# Altium PCB Gateway.PcbDoc (part 1 of 2)
Units mil, origin at the board's own origin, x right, y up, seen from the top; angles counter-clockwise.
Board outline 3149.61 x 3909.45 mil, 2 copper layers (Top Layer, Bottom Layer); 140 components, 140 nets, 576 pads, 80 vias.
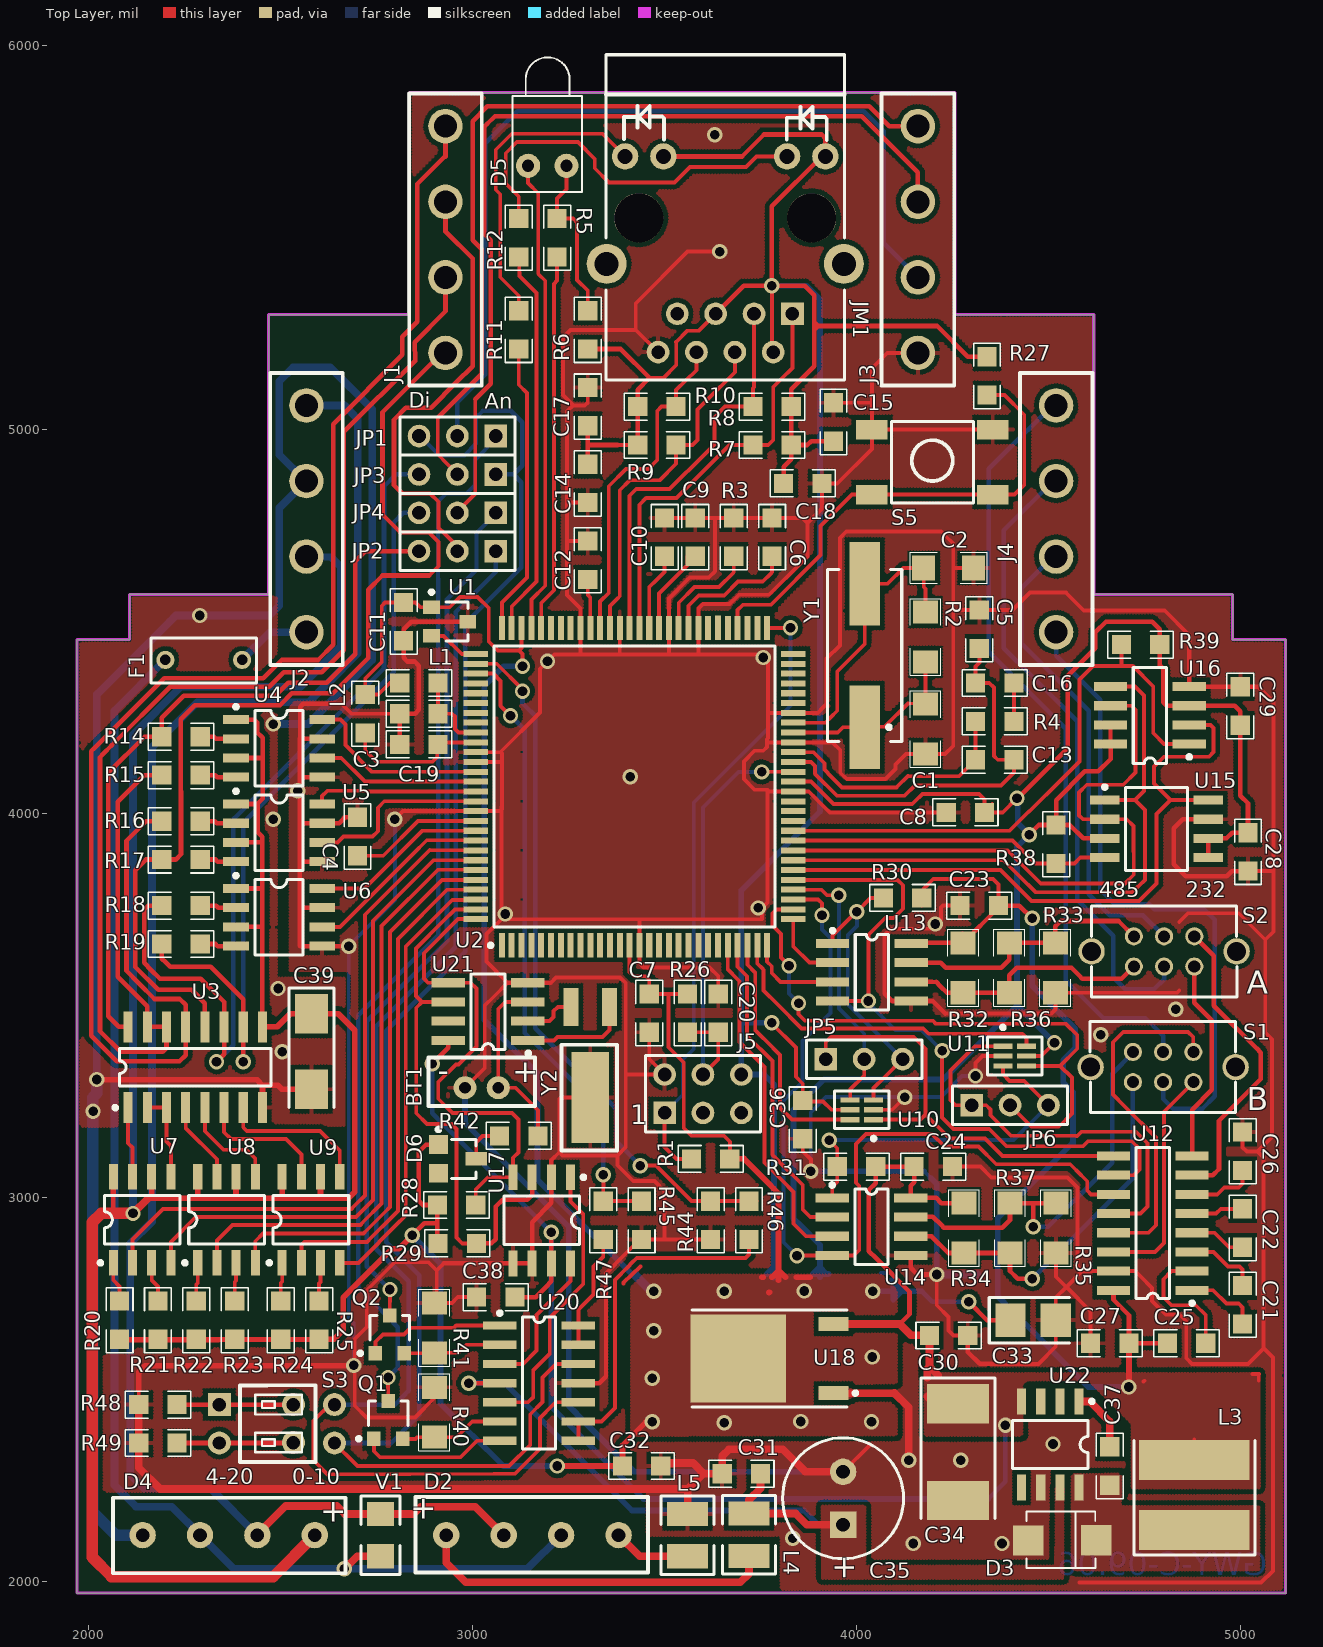
[diagram p0: Top Layer view]
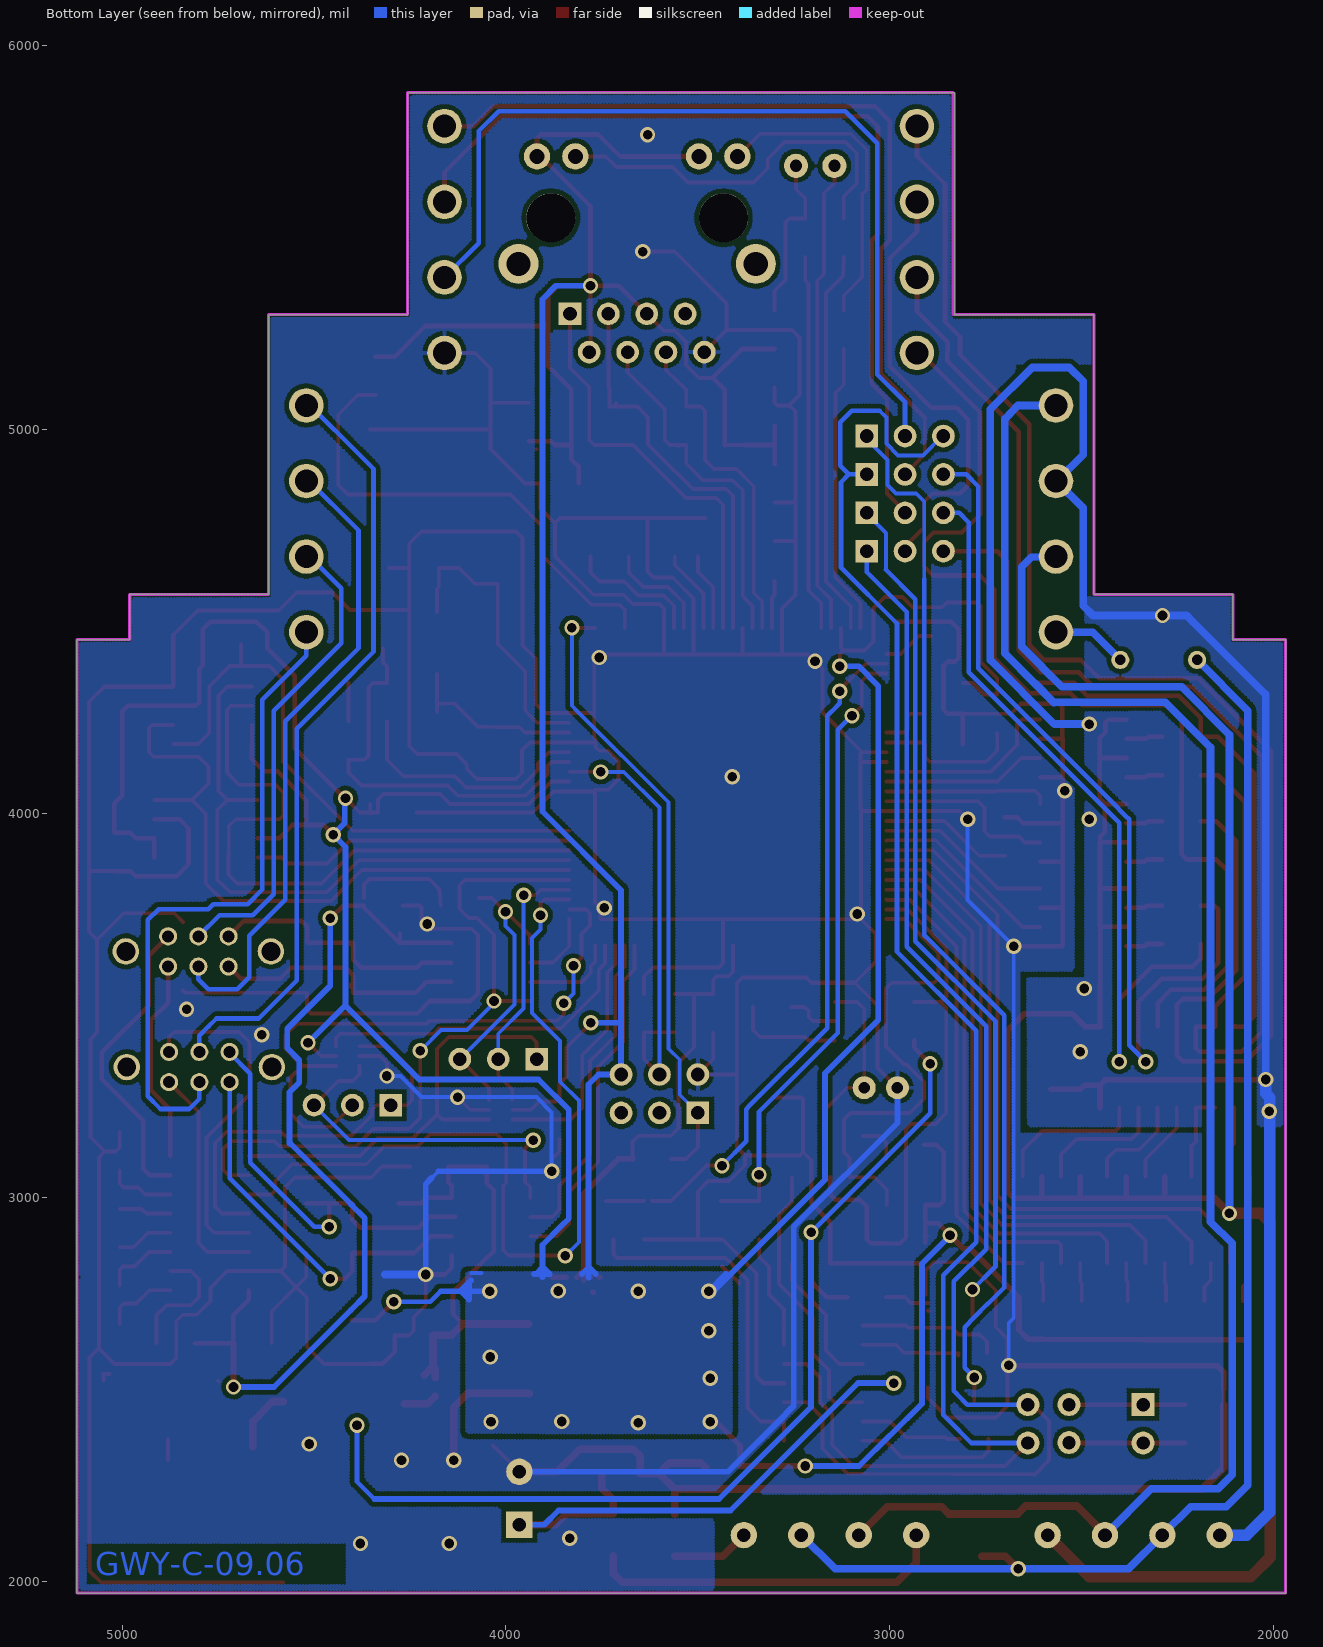
[diagram p1: Bottom Layer view, seen from below]

## Layer stack, top to bottom
Top Layer: signal copper 1.4
Dielectric: dielectric 12.6, FR-4, Dk 4.8
Bottom Layer: signal copper 1.4

## Board outline
1968.5,1968.5 1968.5,4452.76 2106.3,4452.76 2106.3,4570.87 2468.5,4570.87 2468.5,5299.21 2830.71,5299.21 2830.71,5877.95 4255.91,5877.95 4255.91,5299.21 4618.11,5299.21 4618.11,4570.87 4980.31,4570.87 4980.31,4452.76 5118.11,4452.76 5118.11,1968.5

## Design rules (kind name [scope] priority, off if disabled: settings)
Clearance PolyBorder [InPoly vs (OnLayer('Keep-Out Layer'))] p1: gap=1
Clearance And_SOT23 [(InComponent('U10') AND InPadClass('All Pads')) vs (InComponent('U10') AND InPadClass('All Pads'))] p2: gap=6
Clearance Micro [(InComponent('U2') AND InPadClass('All Pads')) vs (InComponent('U2') AND InPadClass('All Pads'))] p3: gap=6
Clearance Polygon [InPoly] p4: gap=12
Clearance [All] p5: gap=10
ComponentClearance [All] p1: gap=10 collisioncheckmode=0
HoleSize [All] p1: absolutevalues=TRUE maxlimit=150 minlimit=1 maxpercent=80.000 minpercent=20.000
PolygonConnect FullConected [(InComponent('U18') OR InComponent('L3') OR InComponent('D3') OR InComponent('C34') OR InComponent('C37') OR InComponent('C35') OR InComponent('U22'))] p1: connectstyle=Direct reliefconductorwidth=10 reliefentries=4 polygonreliefangle="90 Angle"
PolygonConnect [All] p2: connectstyle=Relief reliefconductorwidth=10 reliefentries=4 polygonreliefangle="90 Angle"
RoomDefinition IIC [InComponentClass('IIC')] p1: confinementstyle=ConfineOut formatcopy=TRUE outline 4148.61,1367.13 5119.09,1367.13 5119.09,1697.83 4148.61,1697.83
RoomDefinition UART [InComponentClass('UART')] p2: confinementstyle=ConfineOut formatcopy=TRUE outline 1971.46,975.39 2840.55,975.39 2840.55,1269.68 1971.46,1269.68
RoomDefinition SPI [InComponentClass('SPI')] p3: confinementstyle=ConfineOut formatcopy=TRUE outline 3040.35,1380.91 3972.44,1380.91 3972.44,1690.94 3040.35,1690.94
RoomDefinition POWER [InComponentClass('POWER')] p4: confinementstyle=ConfineOut formatcopy=TRUE outline 3034.45,976.38 3966.54,976.38 3966.54,1274.61 3034.45,1274.61
RoomDefinition MAIN [InComponentClass('MAIN')] p5: confinementstyle=ConfineOut formatcopy=TRUE outline 1970.47,1376.97 2865.16,1376.97 2865.16,1680.12 1970.47,1680.12
RoomDefinition GPIO [InComponentClass('GPIO')] p6: confinementstyle=ConfineOut formatcopy=TRUE outline 4154.53,960.63 5121.06,960.63 5121.06,1263.78 4154.53,1263.78
RoutingVias [All] p1: holewidth=23.62 width=39.37 viastyle="Through Hole" minholewidth=28 minwidth=50 maxholewidth=28 maxwidth=50
SMDNeckDown [All] p1: percent=95.000
SolderMaskExpansion [All] p1: expansion=4
TestPointUsage [All] p1: valid=0 allowmultiple=FALSE
Testpoint [All] p1: side=15 testpointundercomponent=TRUE minsize=40 maxsize=100 preferedsize=60 minholesize=0 maxholesize=40 preferedholesize=32 testpointgrid=1 style=1023 order=1234567890
Width [All] p1: maxlimit=30 minlimit=8 preferedwidth=10 toplayer_prefwidth=12 bottomlayer_prefwidth=15 minimp=50.000000 maximp=50.000000 favimp=50.000000
16 further rules are at their usual default settings.

## Classes and differential pairs
net class IO_AAG_[0..3]: IO_AAG_0 IO_AAG_1 IO_AAG_2 IO_AAG_3
net class AAG_I[1..2]: AAG_I1 AAG_I2
component class MAIN: C1 C2 C3 C4 C5 C6 C7 C8 C9 C10 C11 C12 C13 C14 C15 C16 C17 C18 C19 C20 D5 J5 JM1 L1 L2 R1 R2 R3 R4 R5 R6 R7 R8 R9 R10 R11 R12 R26 R27 S5 U1 U2 Y1
component class GPIO: J1 J3 JP1 JP2 JP3 JP4 R14 R15 R16 R17 R18 R19 R20 R21 R22 R23 R24 R25 U3 U4 U5 U6 U7 U8 U9
component class IIC: BT1 C38 D6 Q1 Q2 R28 R29 R40 R41 R42 R44 R45 R46 R47 R48 R49 S3 U17 U20 U21 Y2
component class POWER: C30 C31 C32 C33 C34 C35 C37 C39 D2 D3 D4 F1 J2 L3 L4 L5 U18 U22 V1
component class SPI: C28 C29 R38 R39 U15 U16
component class UART: C21 C22 C23 C24 C25 C26 C27 C36 J4 JP5 JP6 JU5 R30 R31 R32 R33 R34 R35 R36 R37 S1 S2 U10 U11 U12 U13 U14
net class SPI_[0..4]: SPI_0 SPI_1 SPI_2 SPI_3 SPI_4
net class UART_[0..1]: UART_0 UART_1 UART_2 UART_3
net class CTRL485_[0..3]: CTRL485_0 CTRL485_1 CTRL485_2 CTRL485_3 CTRL485_4 CTRL485_5
net class GPIO_I[1..6]: GPIO_I1 GPIO_I2 GPIO_I3 GPIO_I4 GPIO_I5 GPIO_I6
net class GPIO_O[1..6]: GPIO_O1 GPIO_O2 GPIO_O3 GPIO_O4 GPIO_O5 GPIO_O6
net class IIC_[0..1]: IIC_0 IIC_1

## Components (designator, comment, footprint, x,y, rotation, side; value= is the part's Value field where it differs from the comment)
BT1 "Battery" LITHIUM_BAT 2980,3285.56 r0 top
C1 "Cap Semi" _1206 4180,4220 r270 top
C2 "Cap Semi" _1206 4240,4640 r0 top
C3 "Cap Semi" _0805 2860,4260 r0 top
C4 "Cap Semi" _0805 2700,3940 r90 top
C5 "Cap Semi" _0805 4320,4480 r90 top
C6 "Cap Semi" _0805 3780,4720 r90 top
C7 "Cap Semi" _0805 3460,3480 r90 top
C8 "Cap Semi" _0805 4283.58,4002.95 r0 top
C9 "Cap Semi" _0805 3580,4720 r270 top
C10 "Cap Semi" _0805 3500,4720 r270 top
C11 "Cap Semi" _0805 2820,4500 r90 top
C12 "Cap Semi" _0805 3300,4660 r270 top
C13 "Cap Semi" _0805 4360,4140 r180 top
C14 "Cap Semi" _0805 3300,4860 r90 top
C15 "Cap Semi" _0805 3940,5020 r270 top
C16 "Cap Semi" _0805 4360,4340 r0 top
C17 "Cap Semi" _0805 3300,5060 r270 top
C18 "Cap Semi" _0805 3860,4860 r180 top
C19 "Cap Semi" _0805 2860,4180 r0 top
C20 "Cap Semi" _0805 3640,3480 r270 top
C21 "Cap Semi" _0805 5006,2720 r270 top
C22 "Cap Semi" _0805 5006,2920 r90 top
C23 "Cap Semi" _0805 4320,3760 r180 top
C24 "Cap Semi" _0805 4200,3080 r0 top
C25 "Cap Semi" _0805 4860,2620 r0 top
C26 "Cap Semi" _0805 5006,3120 r90 top
C27 "Cap Semi" _0805 4660,2620 r180 top
C28 "Cap Semi" _0805 5020,3900 r270 top
C29 "Cap Semi" _0805 5000,4280 r90 top
C30 "Cap Semi" _0805 4240,2640 r180 top
C31 "Cap Semi" _0805 3700,2280 r0 top
C32 "Cap Semi" _0805 3440,2300 r180 top
C33 "Cap Pol3" TC3528-1411 4460,2680 r0 top
C34 "Cap Pol3" TC7360-2924 4264.92,2336 r270 top
C35 "Cap Pol1" CAPPR3.5-8X11.5 3964.92,2216 r90 top
C36 "Cap Semi" _0805 3860,3202.41 r90 top
C37 "Cap Semi" _0805 4660,2300 r90 top
C38 "Cap Semi" _0805 3060,2740 r180 top
C39 "Cap Pol3" TC6032-2412 2580,3380 r270 top
D2 "Bridge1" BRIDGE_2A 3380,2120 r180 top locked
D3 "Diode" SMA 4620,2080 r0 top
D4 "Bridge1" BRIDGE_2A 2140,2120 r0 top locked
D5 "LED1" LED_PCB 3200,5740 r0 top locked
D6 "Diode BAS70" SO-G3/C2.5#1 2960,3100 r270 top
F1 "FUSIBLE" FUSE 2300,4400 r180 top
J1 "BORNERA_X4" BORNERA_X4 2929.13,5790.55 r270 top locked
J2 "BORNERA_X4" BORNERA_X4 2566.93,4472.44 r90 top locked
J3 "BORNERA_X4" BORNERA_X4 4160,5790.55 r270 top locked
J4 "BORNERA_X4" BORNERA_X4 4520,4472.44 r90 top locked
J5 "DEBUG" HDR2X3 3500,3220 r0 top
JM1 "JACK_RJ45_LED" JACK_RJ45_LEDS 3658.03,5959.02 r180 top locked
JP1 "Header 3" HDR1X3 3060.16,4983.39 r180 top
JP2 "Header 3" HDR1X3 3060.16,4683.39 r180 top
JP3 "Header 3" HDR1X3 3060.16,4883.39 r180 top
JP4 "Header 3" HDR1X3 3060.16,4783.39 r180 top
JP5 "Header 3" HDR1X3 3920,3360 r0 top
JP6 "Header 3" HDR1X3 4300,3240 r0 top
L1 "Inductor" _0805 2860,4340 r180 top
L2 "Inductor" _0805 2720,4260 r90 top
L3 "Inductor" POWER_IND 4880,2240 r270 top
L4 "Inductor" CR3225-1210 3720,2121 r90 top
L5 "Inductor" CR3225-1210 3560,2120 r90 top
Q1 "QNPN" SO-G3/C2.5#2 2780,2420 r0 top
Q2 "QNPN" SO-G3/C2.5#2 2784,2643 r0 top
R1 "Res3" _0805 3620,3100 r180 top
R2 "Res3" _1206 4180,4460 r90 top
R3 "Res3" _0805 3680,4720 r270 top
R4 "Res3" _0805 4360,4240 r0 top
R5 "Res3" _0805 3220,5500 r270 top
R6 "Res3" _0805 3300,5260 r270 top
R7 "Res3" _0805 3780,4960 r180 top
R8 "Res3" _0805 3780,5060 r0 top
R9 "Res3" _0805 3480,4960 r0 top
R10 "Res3" _0805 3480,5060 r180 top
R11 "Res3" _0805 3120,5260 r270 top
R12 "Res3" _0805 3120,5500 r90 top
R14 "Res3" _0805 2240,4200 r180 top
R15 "Res3" _0805 2240,4100 r180 top
R16 "Res3" _0805 2240,3980 r180 top
R17 "Res3" _0805 2240,3880 r180 top
R18 "Res3" _0805 2240,3760 r180 top
R19 "Res3" _0805 2240,3660 r180 top
R20 "Res3" _0805 2080,2680 r90 top
R21 "Res3" _0805 2180,2680 r90 top
R22 "Res3" _0805 2280,2680 r90 top
R23 "Res3" _0805 2380,2680 r90 top
R24 "Res3" _0805 2500,2680 r90 top
R25 "Res3" _0805 2600,2680 r90 top
R26 "Res3" _0805 3560,3480 r270 top
R27 "Res3" _0805 4340,5140 r270 top
R28 "Res3" _0805 2958,2980 r0 top
R29 "Res3" _0805 2960,2880 r180 top
R30 "Res3" _0805 4120,3780 r0 top
R31 "Res3" _0805 4000,3080 r0 top
R32 "Res3" _1206 4278,3598 r90 top
R33 "Res3" _1206 4518,3598 r90 top
R34 "Res3" _1206 4280,2920 r90 top
R35 "Res3" _1206 4520,2920 r90 top
R36 "Res3" _1206 4398,3598 r270 top
R37 "Res3" _1206 4400,2920 r270 top
R38 "Res3" _0805 4520,3920 r270 top
R39 "Res3" _0805 4740,4440 r180 top
R40 "Res3" _1206 2900,2440 r90 top
R41 "Res3" _1206 2900,2660 r90 top
R42 "Res3" _0805 3120,3160 r180 top
R44 "Res3" _0805 3620,2940 r90 top
R45 "Res3" _0805 3440,2940 r90 top
R46 "Res3" _0805 3720,2940 r90 top
R47 "Res3" _0805 3340,2940 r90 top
R48 "Res3" _0805 2180,2460 r0 top
R49 "Res3" _0805 2180,2360 r0 top
S1 "SW-DPDT" SWITCH_EG2207 4720,3300 r90 top
S2 "SW-DPDT" SWITCH_EG2207 4880,3680 r270 top
S3 "SW DIP-2" SWITCH_2SPST 2340,2460 r0 top
S5 "SW-SPST" SWITCH 4040,5000 r0 top
U1 "LM60BIM3" MA03B 2940,4500 r270 top
U2 "MC9S12NE64PV" QFP20x20-G112/Y1.6N 3421.61,4070.16 r90 top locked
U3 "ULN2001AD" D016 2277.28,3339.02 r0 top
U4 "MOCD213" SO-G8/D5 2495.55,4169.61 r270 top
U5 "MOCD213" SO-G8/D5 2495.55,3949.61 r270 top
U6 "MOCD213" SO-G8/D5 2495.55,3729.61 r270 top
U7 "MOCD213" SO-G8/D5 2138.7,2941.5 r0 top
U8 "MOCD213" SO-G8/D5 2358.7,2941.5 r0 top
U9 "MOCD213" SO-G8/D5 2578.7,2941.5 r0 top
U10 "NC7SZ157" SO-G6/Z2.8 4014,3228 r90 top
U11 "NC7SZ157" SO-G6/Z2.8 4412,3368 r270 top
U12 "MAX232ACSE" NSO16 4771.86,2932.71 r90 top
U13 "DS3695AM" M08A 4040.01,3586.39 r270 top
U14 "DS3695AM" M08A 4039.02,2923.62 r270 top
U15 "AT45DB041B" SO-G8/E4.1 4781.5,3960 r270 top
U16 "ST95040M1" SOP8 4764.29,4255.75 r90 top
U17 "MAX518" SO-G8/D5 3180,2940 r180 top
U18 "LD1117" SIP-G3/D11.3 3816,2580 r90 top
U20 "LM224AD" SO14B 3173,2516 r270 top
U21 "DS1307Z" SOIC8N 3040,3484 r90 top
U22 "LM2672" SO-G8/D5 4504.92,2356 r180 top
V1 "Res Varistor" CR3216-1206 2760,2120 r270 top
Y1 "XTAL" HC49/4H_SMX 4021.42,4411.65 r90 top
Y2 "CRISTAL_SMD" XTAL_32KHZ 3320,3440 r90 top

## Footprints (in the part's own frame and the unit in brackets; to place one, negate y for a bottom-side part, rotate by r counter-clockwise, add the part's x,y. Pads: shape width x height; smd on the part's side, far side on the other; paste and mask are expansions set on the pad)
_0805 [mil]
  rect 50x50 smd: 1(-50,0) 2(50,0)
  silkscreen extent -85,-35 85,35
_1206 [mil]
  rect 60x65 smd: 1(-65,0) 2(65,0)
  silkscreen extent -100,-40 100,40
BORNERA_X4 [mil]
  round 90 hole 60: 1(0,0) 2(196.85,0) 3(393.7,0) 4(590.55,0)
  silkscreen extent -86,-94 675,94
BRIDGE_2A [mm] "Single Phase Bridge Rectifier"
  round 1.75 hole 0.9: 1(0,0) 2(3.8,0) 3(11.4,0) 4(7.6,0)
  silkscreen extent -1.95,-2.52 13.42,2.48
CAPPR3.5-8X11.5 [mm]
  rect 1.75x1.75 hole 0.9: 1(-1.75,0)
  round 1.75 hole 0.9: 2(1.75,0)
  silkscreen extent -4,-4 4,4
CR3216-1206 [mm]
  rect 1.6x1.8 smd: 1(-1.4,0) 2(1.4,0)
  silkscreen extent -2.6,-1.3 2.6,1.3
CR3225-1210 [mm]
  rect 1.6x2.7 smd: 1(-1.4,0) 2(1.4,0)
  silkscreen extent -2.6,-1.75 2.6,1.75
D016 [mm] "Small Outline; 16 Leads; Body Width 3.9 mm; Pitch 1.27 mm"
  rect 0.6x2.05 smd: 1(-4.445,-2.675) 2(-3.175,-2.675) 3(-1.905,-2.675) 4(-0.635,-2.675) 5(0.635,-2.675) 6(1.905,-2.675) 7(3.175,-2.675) 8(4.445,-2.675) 9(4.445,2.675) 10(3.175,2.675) 11(1.905,2.675) 12(0.635,2.675) 13(-0.635,2.675) 14(-1.905,2.675) 15(-3.175,2.675) 16(-4.445,2.675)
  silkscreen extent -5.42,-2.8 5,1.25
FUSE [mm]
  round 1.2 hole 0.7: 1(-2.524,0) 2(2.556,0)
  silkscreen extent -3.48,-1.46 3.51,1.52
HC49/4H_SMX [mm]
  rect 5.5x2 smd: 1(-4.75,0) 2(4.75,0)
  silkscreen extent -5.7,-2.45 5.7,2.45
HDR1X3 [mm] "Connector; Header; 3 Position"
  rect 1.5x1.5 hole 0.9: 1(0,0)
  round 1.5 hole 0.9: 2(2.54,0) 3(5.08,0)
  silkscreen extent -1.27,-1.27 6.35,1.27
HDR2X3 [mm] "Connector; Header; 3x2 Position"
  rect 1.5x1.5 hole 0.9: 1(0,0)
  round 1.5 hole 0.9: 2(0,2.54) 3(2.54,0) 4(2.54,2.54) 5(5.08,0) 6(5.08,2.54)
  silkscreen extent -1.27,-1.27 6.35,3.81
JACK_RJ45_LEDS [mm]
  rect 1.5x1.5 hole 0.9: 1(-4.445,16.69)
  round 1.5 hole 0.9: 2(-3.175,19.23) 3(-1.905,16.69) 4(-0.635,19.23) 5(0.635,16.69) 6(1.905,19.23) 7(3.175,16.69) 8(4.445,19.23)
  round 1.75 hole 1: GA(4.09,6.28) GK(6.63,6.28) YA(-6.63,6.28) YK(-4.09,6.28)
  round 2.65 hole 1.6: MH1(-7.849,13.388) MH2(7.849,13.388)
  round 3.25 hole 3.25: MH3(-5.715,10.34) MH4(5.715,10.34)
  silkscreen extent -7.9,-0.45 7.9,21.06
LED_PCB [mm]
  round 1.6 hole 0.8: 1(1.126,-1.333) 2(-1.414,-1.333)
  silkscreen extent -2.44,-3.06 2.16,5.84
LITHIUM_BAT [mil]
  round 60 hole 30: 1(86.61,0) 2(0,0)
  silkscreen extent -95,-47 182,79
M08A [mm] "Small Outline; 8 Leads; Body Width 3.9 mm; Pitch 1.27 mm"
  rect 0.6x2.2 smd: 1(-1.905,-2.6) 2(-0.635,-2.6) 3(0.635,-2.6) 4(1.905,-2.6) 5(1.905,2.6) 6(0.635,2.6) 7(-0.635,2.6) 8(-1.905,2.6)
  silkscreen extent -2.88,-2.72 2.5,1.1
MA03B [mm] "SOT-23; 3 Leads; Body 3.0 x 2.6 mm, inc. leads (LxW max)"
  rect 0.9x1.1 smd: 1(-0.95,-1.2) 2(0.95,-1.2) 3(0,1.2)
  silkscreen extent -2.07,-1.32 1.3,1.2
NSO16 [mm] "Small Outline; 16 Leads; Body Width 3.9 mm; Pitch 1.27 mm"
  rect 0.6x2.2 smd: 1(-4.445,-2.6) 2(-3.175,-2.6) 3(-1.905,-2.6) 4(-0.635,-2.6) 5(0.635,-2.6) 6(1.905,-2.6) 7(3.175,-2.6) 8(4.445,-2.6) 9(4.445,2.6) 10(3.175,2.6) 11(1.905,2.6) 12(0.635,2.6) 13(-0.635,2.6) 14(-1.905,2.6) 15(-3.175,2.6) 16(-4.445,2.6)
  silkscreen extent -5.42,-2.72 5,1.1
POWER_IND [mm]
  rect 2.65x7.3 smd: 1(2.7,0) 2(-1.925,0)
  silkscreen extent -3.22,-4 4.35,4.03
QFP20x20-G112/Y1.6N [mm]
  rect 1.6x0.4 smd: 1(-10.5,8.775) 2(-10.5,8.125) 3(-10.5,7.475) 4(-10.5,6.825) 5(-10.5,6.175) 6(-10.5,5.525) 7(-10.5,4.875) 8(-10.5,4.225) 9(-10.5,3.575) 10(-10.5,2.925) 11(-10.5,2.275) 12(-10.5,1.625) 13(-10.5,0.975) 14(-10.5,0.325) 15(-10.5,-0.325) 16(-10.5,-0.975) 17(-10.5,-1.625) 18(-10.5,-2.275) 19(-10.5,-2.925) 20(-10.5,-3.575) 21(-10.5,-4.225) 22(-10.5,-4.875) 23(-10.5,-5.525) 24(-10.5,-6.175) 25(-10.5,-6.825) 26(-10.5,-7.475) 27(-10.5,-8.125) 28(-10.5,-8.775) 57(10.5,-8.775) 58(10.5,-8.125) 59(10.5,-7.475) 60(10.5,-6.825) 61(10.5,-6.175) 62(10.505,-5.525) 63(10.5,-4.875) 64(10.5,-4.225) 65(10.5,-3.575) 66(10.5,-2.925) 67(10.5,-2.275) 68(10.5,-1.625) 69(10.5,-0.975) 70(10.5,-0.325) 71(10.5,0.325) 72(10.5,0.975) 73(10.5,1.625) 74(10.5,2.275) 75(10.5,2.925) 76(10.5,3.575) 77(10.5,4.225) 78(10.5,4.875) 79(10.5,5.525) 80(10.5,6.175) 81(10.5,6.825) 82(10.5,7.475) 83(10.5,8.125) 84(10.5,8.775)
  rect 0.4x1.6 smd: 29(-8.775,-10.5) 30(-8.125,-10.5) 31(-7.475,-10.5) 32(-6.825,-10.5) 33(-6.175,-10.5) 34(-5.525,-10.5) 35(-4.875,-10.5) 36(-4.225,-10.5) 37(-3.575,-10.5) 38(-2.925,-10.5) 39(-2.275,-10.5) 40(-1.625,-10.5) 41(-0.975,-10.5) 42(-0.325,-10.5) 43(0.325,-10.5) 44(0.975,-10.5) 45(1.625,-10.5) 46(2.275,-10.5) 47(2.925,-10.5) 48(3.575,-10.5) 49(4.225,-10.5) 50(4.875,-10.5) 51(5.525,-10.5) 52(6.175,-10.5) 53(6.825,-10.5) 54(7.475,-10.5) 55(8.125,-10.5) 56(8.775,-10.5) 85(8.775,10.5) 86(8.125,10.5) 87(7.475,10.5) 88(6.825,10.5) 89(6.175,10.5) 90(5.525,10.5) 91(4.875,10.5) 92(4.225,10.5) 93(3.575,10.5) 94(2.925,10.5) 95(2.275,10.5) 96(1.625,10.5) 97(0.975,10.5) 98(0.325,10.5) 99(-0.325,10.5) 100(-0.975,10.5) 101(-1.625,10.5) 102(-2.275,10.5) 103(-2.925,10.5) 104(-3.575,10.5) 105(-4.225,10.5) 106(-4.875,10.5) 107(-5.525,10.5) 108(-6.175,10.5) 109(-6.825,10.5) 110(-7.475,10.5) 111(-8.125,10.5) 112(-8.775,10.5)
  silkscreen extent -10.63,-9.3 9.3,9.65
SIP-G3/D11.3 [mm]
  rect 0.95x2 smd: 1(-2.285,-3.15) 3(2.285,-3.15)
  rect 5.8x6.3 smd: 4(0,3.15)
  silkscreen extent -3.2,-4.72 3.2,6.2
SMA [mm]
  rect 2.032x2 smd: 1(-4.375,0.65) 2(0.125,0.675)
  silkscreen extent -4.5,-1.17 0.06,2.58
SO14B [mm] "Small Outline; 14 Leads; Body Width 3.9 mm; Pitch 1.27 mm"
  rect 0.55x2.2 smd: 1(-3.81,-2.6) 2(-2.54,-2.6) 3(-1.27,-2.6) 4(0,-2.6) 5(1.27,-2.6) 6(2.54,-2.6) 7(3.81,-2.6) 8(3.81,2.6) 9(2.54,2.6) 10(1.27,2.6) 11(0,2.6) 12(-1.27,2.6) 13(-2.54,2.6) 14(-3.81,2.6)
  silkscreen extent -4.76,-2.72 4.38,1.1
SO-G3/C2.5#1 [mm]
  rect 1.25x1.25 smd: 1(-0.95,-1.25) 2(0.95,-1.25)
  rect 0.9x1.45 smd: 3(0,1.25)
  silkscreen extent -2.07,-1.37 1.3,1.25
SO-G3/C2.5#2 [mm]
  rect 0.9x0.95 smd: 1(-0.95,-1.25) 2(0.95,-1.25) 3(0,1.25)
  silkscreen extent -2.07,-1.37 1.3,1.25
SO-G6/Z2.8 [mm]
  rect 0.35x1.25 smd: 1(-0.65,-0.775) 2(0,-0.775) 3(0.65,-0.775) 4(0.65,0.775) 5(0,0.775) 6(-0.65,0.775)
  silkscreen extent -2.02,-1.8 1.25,1.8
SO-G8/D5 [mm]
  rect 0.6x1.7 smd: 1(-1.905,-2.85) 2(-0.635,-2.85) 3(0.635,-2.85) 4(1.905,-2.85) 5(1.905,2.85) 6(0.635,2.85) 7(-0.635,2.85) 8(-1.905,2.85)
  silkscreen extent -2.88,-2.97 2.5,1.6
SO-G8/E4.1 [mm]
  rect 0.6x1.95 smd: 1(-1.905,-3.425) 2(-0.635,-3.425) 3(0.635,-3.425) 4(1.905,-3.425) 5(1.905,3.425) 6(0.635,3.425) 7(-0.635,3.425) 8(-1.905,3.425)
  silkscreen extent -2.89,-3.55 2.75,2.05
SOIC8N [mm] "Small Outline; 8 Leads; Body Width 3.9 mm; Pitch 1.27 mm"
  rect 0.6x2.2 smd: 1(-1.905,-2.625) 2(-0.635,-2.625) 3(0.635,-2.625) 4(1.905,-2.625) 5(1.905,2.625) 6(0.635,2.625) 7(-0.635,2.625) 8(-1.905,2.625)
  silkscreen extent -2.88,-2.79 2.5,1.13
SOP8 [mm]
  rect 0.6x2.2 smd: 1(-1.905,-2.6) 2(-0.635,-2.6) 3(0.635,-2.6) 4(1.905,-2.6) 5(1.905,2.6) 6(0.635,2.6) 7(-0.635,2.6) 8(-1.905,2.6)
  silkscreen extent -3.17,-2.72 3.18,1.1
SWITCH [mm]
  rect 2.1x1.3 smd: 1(0,0) 1(8,0) 2(0,-4.3) 2(8,-4.3)
  silkscreen extent 1.31,-4.85 6.73,0.55
SWITCH_2SPST [mil] "Thru-Hole DIP Switch"
  rect 60x60 hole 35: 1(0,0)
  round 60 hole 35: 2(0,-100) 3(300,-100) 4(300,0)
  silkscreen extent 54,-150 250,50
SWITCH_EG2207 [mm]
  round 1.2 hole 0.8: 1(0,0) 6(2,0)
  round 1.2 hole 0.8 mask+0.102: 2(0,-2) 3(0,-4) 4(2,-4) 5(2,-2)
  round 1.75 hole 1.25: ""(1,2.8) ""(1,-6.8)
  silkscreen extent -2,-6.8 4,2.82
TC3528-1411 [mm]
  rect 2x2.2 smd: 1(-1.5,0) 2(1.5,0)
  silkscreen extent -2.9,-1.5 2.4,1.5
TC6032-2412 [mm]
  rect 2.6x2.2 smd: 1(-2.5,0) 2(2.5,0)
  silkscreen extent -4.2,-1.5 3.7,1.5
TC7360-2924 [mm]
  rect 2.6x4.1 smd: 1(-3.2,0) 2(3.2,0)
  silkscreen extent -4.9,-2.45 4.4,2.45
XTAL_32KHZ [mm]
  rect 6x2.5 smd: 0(-4.575,0.35)
  rect 2.5x1 smd: 1(1.425,1.62) 2(1.425,-0.92)
  silkscreen extent -8.08,-1.42 -1.07,2.25

## Part data
BT1: "Multicell Battery"
C1 C2 C3 C4 C5 C6 C7 C8 C9 C10 C11 C12 C13 C14 C15 C16 C17 C18 C19 C20 C21 C22 C23 C24 C25 C26 C27 C28 C29 C30 C31 C32 C36 C37 C38: "Capacitor (Semiconductor SIM Model)"
C33 C34 C39: "Polarized Capacitor (Surface Mount)"
C35: "Polarized Capacitor (Radial)"
D2 D4: "Full Wave Diode Bridge"
D3: "Default Diode"
D5: "Typical RED GaAs LED"
D6: "Silicon AF Schottky Diode for High-Speed Switching"
F1: "Resetteable Fuse"
J5: library part "Header 3X2", "Header, 3-Pin, Dual row"
JM1: "RJ45 Connector Jack with Leds"
JP1 JP2 JP3 JP4 JP5 JP6: "Header, 3-Pin"
Q1 Q2: "NPN Bipolar Transistor"
R1 R2 R3 R4 R5 R6 R7 R8 R9 R10 R11 R12 R14 R15 R16 R17 R18 R19 R20 R21 R22 R23 R24 R25 R26 R27 R28 R29 R30 R31 R32 R33 R34 R35 R36 R37 R38 R39 R40 R41 R42 R44 R45 R46 R47 R48 R49: "Resistor"
S1 S2: "Double-Pole, Double-Throw Switch"
S3: "DIP Switch"
S5: "Single-Pole, Single-Throw Switch"
U1: "2.7V, SOT-23 Temperature Sensor"
U2: "Integrated Ethernet Controller"
U3: library part ULN2003AD, "Darlington Transistor Array"
U4 U5 U6 U7 U8 U9: "Dual Channel Phototransistor"
U10: library part NC7SZ126, "UHS Buffer with 3-state output"
U11: "Tiny Logic 2-Input Non-Inverter Mux"
U12: "+5V Powered, Multi-Channel RS-232 Driver/Receiver"
U13 U14: "Multipoint RS485/RS422 Transceiver"
U15: library part M25P40, "4 Mbit Serial Flash"
U16: "4K Serial SPI EEPROM with Positive Clock Strobe"
U17: "2-Wire serial 8-bit DACs"
U18: library part VREG_3V3, "SMD SOT223 Voltage Regulator"
U20: library part LM324AD, "Low-Power Quad Operational Amplifier"
U21: "64 X 8 Serial Real-Time Clock"
U22: "Simple switcher voltage regulator 1A"
V1: "Varistor (Voltage-Sensitive Resistor)"
Y1: "Crystal Oscillator"

## Free pads (board coordinates)
  round 60 hole 35: 0(2533,2460) 1(2533,2361)

## Via types
v1: diameter 40, hole 25, Top Layer to Bottom Layer, 80 vias

## Nets (pads, with @x,y where several pads share a name; then routed paths per layer and width w, separated by ;. In a path a pad name is that pad's centre, name@x,y a point inside that pad or via, vN(x,y) a via of type N, cw(c..) or ccw(c..) an arc to the next point about the centre after c; other vN are vias at no path point)
AAG_I1: R44.2 R46.2 U2.86 | length 1840.6
  Top Layer w10: U2.86@3008.23,4390.04 3062.72,4390.04 3129.92,4322.83 v1(3129.92,4318.9) ; v1(3437.01,3082.68) 3477.36,3082.68 3570.04,2990 R44.2@3620,2990 ; R44.2@3640,2990 R46.2@3740,2990
  Bottom Layer w10: v1(3437.01,3082.68) v1@3437.01,3084.65
  Bottom Layer w12: v1(3129.92,4318.9) 3129.92,4287.4 3150.59,4266.73 3151.27,4266.73 3163,4255 3163,3440.97 3363.19,3240.78 3374,3229.97 3374,3146 3437.01,3082.99 v1(3437.01,3082.68)
AAG_I2: R45.2 R47.2 U2.87 | length 1640.2
  Top Layer w10: U2.87@3008.23,4364.45 3053.86,4364.45 3072.83,4345.47 3072.83,4280.51 v1(3098.43,4254.92) v1@3098.43,4255.91 ; v1(3340.55,3059.06) R47.2@3340,2990 R45.2@3440,2990
  Bottom Layer w12: v1(3098.43,4254.92) 3099.08,4254.92 3136,4218 3136,3428 3340.55,3223.45 v1(3340.55,3059.06)
CTRL485_0: U2.28 U13.3 | length 245.7
  Top Layer w10: U2.28@3767.09,3656.77 3767.09,3613.91 3779,3602 3779,3584 3801.61,3561.39 3811.61,3561.39 U13.3@3937.65,3561.39
CTRL485_1: U2.29 U13.2 | length 191
  Top Layer w10: U2.29@3835,3724.69 3835,3683.7 3835,3654 3877.61,3611.39 U13.2@3937.65,3611.39
CTRL485_2: U2.26 U10.6 | length 654.1
  Top Layer w10: U2.26@3715.91,3656.77 3716,3606 3736,3586 3736,3436 3783,3389 3784,3388 3801,3371 3801,3233 3831.59,3202.41 3932.59,3202.41 U10.6@3983.49,3202.41
CTRL485_3: U2.27 U11.6 | length 882.2
  Top Layer w10: U2.27@3741.5,3656.77 3741.5,3609.5 3755,3596 3758,3593 3758,3539 3794,3503 3857,3440 4174,3440 4188,3426 4425,3426 4432,3426 4442.51,3415.49 U11.6@4442.51,3393.59
CTRL485_4: U2.25 U14.2 | length 844.3
  Top Layer w10: U2.25@3690.32,3656.77 3690.32,3600.68 3715,3576 3715,3421 3781,3355 3781,3154 3781,3133 3781,3110.73 3830.71,3061.02 3830.71,3061.29 3860,3032 3860,2968 3879.38,2948.62 U14.2@3936.65,2948.62
CTRL485_5: U2.24 U14.3 | length 910.8
  Top Layer w10: U2.24@3664.72,3656.77 3664.72,3593.28 3690,3568 3695,3563 3695,3405 3760,3340 3760,3141 3760,3121 3760,3090.39 3760,3090 3807,3043 3836,3014 3836,2931 3868.38,2898.62 U14.3@3936.65,2898.62
GND: BT1.2 C1.2 C2.2 C3.1 C4.2 C5.2 C6.2 C7.1 C8.1 C9.1 C10.1 C11.1 C12.1 C14.1 C15.1 C17.1 C18.1 C19.1 C20.1 C23.2 C24.2 C26.2 C27.2 C28.2 C29.2 C30.1 C31.1 C32.1 C33.2 C34.2 C35.2 C36.1 C38.2 D3.1 J3.4 J5.2 JM1.8 L5.2 R3.1 R33.1 R35.1 R40.2 R41.2 R44.1 R45.1 R48.1 R49.1 S5.1 U1.3 U2.15 U2.42 U2.47 U2.50 U2.64 U2.67 U2.72 U2.76 U2.95 U2.96 U2.101 U4.5 U4.7 U5.5 U5.7 U6.5 U6.7 U10.2 U11.2 U12.15 U13.5 U14.5 U15.7 U16.4 U17.2 U17.5 U17.6 U18.1 U20.11 U21.4 U22.6 Y2.0 | length 33400.3
  Top Layer w10: R48.1@2130,2460 2130,2500 ; 2549.21,3655.67 2550.28,3654.61 ; 2549.21,3754.92 2549.53,3754.61 ; 2549.21,3875.98 2550.59,3874.61 ; 2549.21,3976.38 2550.98,3974.61 ; 2549.21,4095.47 2550.08,4094.61 ; 2549.21,4195.87 2550.47,4194.61 ; U6.5@2607.76,3654.61 U6.5@2607.83,3654.53 ; 2657.48,4286.42 2683.9,4260 C3.1@2810,4260 ; v1(2797.24,3985.24) 2818.19,4006.18 U2.101@3008.23,4006.18 3071.14,4006.18 3076.06,4011.1 3076.06,4156.77 3073.11,4159.73 ; R41.2@2898,2703 R41.2@2900,2705 ; R40.2@2900,2505 2900,2477 2849.54,2426.54 2723.43,2426.54 2692.91,2457.06 2692.91,2630.91 2724,2662 2724,2758 2797,2831 2885.07,2831 2906.54,2809.54 ; R41.2@2900,2725 2946,2725 2961,2740 C38.2@3010,2740 ; R41.2@2906.54,2746.54 2906.54,2809.54 ; 2924.8,2827.8 2906.54,2809.54 ; BT1.2@2980,3285.56 3031.5,3337.05 3031.5,3499.39 3056.1,3524 3091.1,3559 3036,3614.1 3036,3615 3036.42,3686.02 3074.8,3724.41 3074.8,4017.72 ; U2.96@3008.23,4134.13 3076.06,4134.13 ; U2.95@3008.23,4159.73 3073.11,4159.73 ; v1@3075.79,3724.41 3753.94,3724.41 3753.94,3753.94 3767.72,3767.72 3767.72,4062.01 ; 3203.68,3559 3217.52,3572.83 3383.86,3572.83 3398.62,3558.07 3398.62,3130.91 3376.97,3109.25 ; 3205,3097 3225.5,3117.5 3226,3117.5 ; 3246,4810 C14.1@3300,4810 ; C12.1@3300,4710 3246,4710 ; C17.1@3300,5110 3300,5071 3292,5063 3261,5063 ; Y2.0@3306.22,3259.88 3229.88,3259.88 3226,3256 3226,3117.5 ; 3347,2533 3347,2801.83 3397,2851.83 3397.1,2851.83 3435.28,2890 R45.1@3440,2890 3500,2890 ; 3381.89,4414.37 3383.23,4415.71 U2.72@3383.23,4483.54 ; 3393,2775.89 3392.89,2777.89 3437.11,2820 ; 3398.62,3318.9 3399.72,3320 J5.2@3500,3320 3460,3360 C7.1@3460,3430 ; 3430.12,3724.41 3434.41,3720.12 U2.15@3434.41,3656.77 3434.41,3610.59 3441,3604 3441,3603 3445,3599 3617,3599 3640,3576 C20.1@3640,3530 ; C10.1@3480,4770 3560,4770 3607,4770 3660,4770 3760,4770 3859.23,4770 3872.31,4756.91 3871.91,4756.91 ; JM1.8@3483.03,5201.93 3424.96,5260 ; 3587.95,4417.95 3588,4534 3600,4546 3669.56,4546 3693.44,4569.88 3771.92,4569.88 3857.55,4655.51 3871.91,4669.87 3871.91,4756.91 ; 3630.91,4768.03 3630.91,4630.91 3615.16,4615.16 3565.94,4615.16 3560.04,4609.25 3560.04,4608.81 3511.18,4559.95 3511.18,4415.98 3512.8,4414.37 ; R44.1@3640,2890 3500,2890 ; v1(3643.7,5464) 3560,5464 3424.96,5328.96 3424.96,5260 ; 3769.68,4185.04 U2.47@3835,4185.32 3937.72,4185.32 3957.68,4165.35 3957.68,4106.3 3974.41,4089.57 4075.79,4089.57 4087.6,4101.38 4087.6,4101.6 4102,4116 4102,4127.78 4109.22,4135 4129.22,4155 C1.2@4180,4155 4231,4155 4252,4176 4252,4189 4251.97,4687.99 4251.97,4703.03 4230,4725 4220.75,4734.25 4084.75,4734.25 4060,4734.25 ; 3769.68,4261.81 U2.50@3835,4262.09 3898.9,4262.09 3912.68,4275.87 3922.24,4285.43 3922.24,4403.54 3956.69,4437.99 3956.69,4717.52 3973.43,4734.25 4068.9,4734.25 ; C36.1@3860,3152.41 3860,3119.83 3881,3098.83 v1@3881,3051 ; C15.1@3940,5070 4039,5070 ; C35.2@3964.92,2284.9 4033.46,2353.44 ; S5.1@4040,5010 4040,4950 3950,4860 C18.1@3910,4860 3910,4795 3871.91,4756.91 ; U10.2@4044.51,3228 4093,3228 v1(4126,3261) ; 4080.82,3523.49 4072.84,3531.46 4072.84,3683.04 4089.57,3699.77 4179.14,3699.77 4196.77,3699.77 4220,3723 4220,3755 4225,3760 C23.2@4270,3760 ; U13.5@4142.37,3511.39 U13.5@4157.88,3511.39 ; J3.4@4160,5200 4079.92,5200 4040,5160.08 S5.1@4040,5000 S5.1@4354.96,5000 ; v1(4209,2799) 4209,2759 4209,2719 4240,2688 4240,2653 4253,2640 C30.1@4290,2640 ; 4231,3479 4508,3479 4518,3489 R33.1@4518,3533 4624.46,3533 4835,3533 4841,3539 ; C8.1@4233.58,4002.95 3930.12,4002.95 3875.71,4057.36 U2.42@3835,4057.36 3772.36,4057.36 3767.72,4062.01 ; C24.2@4250,3080 4310,3080 4323,3080 4351,3052 4550,3052 4576,3026 4576,2819.42 4587.71,2807.71 ; 4252.97,4530 C5.2@4320,4530 4406,4530 4451.79,4575.79 4546.26,4575.79 4546.26,4574.74 4592,4529 4803,4529 4866.65,4465.35 ; 4253,4640 C2.2@4305,4640 ; v1(4310,3316) 4310,3350 4328,3368 U11.2@4381.49,3368 ; 4352,2566 4474,2566 4519.06,2611.06 C33.2@4519.06,2680 4519.06,2739.06 4546.62,2766.62 ; R35.1@4520,2829.06 R35.1@4520,2855 4520,2793 4546,2767 ; 4580.71,1996.06 5054.13,1996.06 5084.65,2026.57 5084.65,2582.68 5061.32,2606 5060,2606 ; C27.2@4610,2620 4610,2703.25 4546.62,2766.62 ; 4841,3717 4864,3740 4996,3740 5065,3671 ; C26.2@5006,3170 5006,3130 5017,3119 5045,3119 ; C28.2@5020,3850 5084,3850 5086,3848 ; 5047,4330 5086,4291 5086,3911 5086,3848 ; 3073.11,4159.73 3073.11,4160.71 3175.2,4262.8 3175.2,4376.97 3212.6,4414.37 3282.2,4414.37 ; 3226,3117.5 3234.25,3109.25 3376.97,3109.25 ; 3246,4710 3246,4999 3246,5048 3261,5063 ; 3246,4710 3246,4568.79 3280.51,4534.45 3280.87,4415.71 3282.2,4414.37 ; 3261,5063 3261,5064 3235,5090 3235,5240 3255,5260 3424.96,5260 ; 3282.2,4414.37 3512.8,4414.37 ; 3376.97,3109.25 3376.97,3109.03 3376.97,3083.66 3418.31,3042.32 3473.43,3042.32 3500,3015.75 3500,2890 ; 3512.8,4414.37 3749.02,4414.37 3769.68,4393.7 3769.68,4195.87 3766.73,4192.91 3766.73,4173.23 3756.89,4163.39 3734.25,4163.39 3706.69,4135.83 3706.69,4089.57 3734.25,4062.01 3767.72,4062.01 ; 4546.62,2766.62 4587.71,2807.71 ; 4587.71,2807.71 U12.15@4669.5,2807.71 4726.29,2807.71 4741,2793 4770,2764 4770,2730 4806,2694 4842,2694 4859,2677 4859,2581 4874,2566 5020,2566 5060,2606 ; 5045,3119 5082.68,3156.68 5082.68,3411.42 5065,3429.09 5065,3671 ; 5045,3119 5060,3104 5060,2606 ; 5065,3671 5086,3692 5086,3848
  Top Layer w12: 2549.21,3655.67 2549.21,4195.87 ; 2549.53,3754.61 U6.7@2607.76,3754.61 ; 2550.08,4094.61 U4.5@2607.76,4094.61 ; 2550.28,3654.61 U6.5@2607.76,3654.61 ; 2550.59,3874.61 U5.5@2607.76,3874.61 ; 2550.98,3974.61 U5.7@2607.76,3974.61 2652.76,3974.61 2668.15,3990 C4.2@2700,3990 ; U4.7@2607.76,4194.61 2550.47,4194.61 2550.47,4277.83 2559.06,4286.42 2657.48,4286.42 ; U6.5@2607.83,3654.53 v1(2677.17,3654.53) ; C19.1@2810,4180 C3.1@2810,4260 2850,4260 2860,4270 2860,4385 2849,4396 2830,4396 2820,4406 2820,4419 C11.1@2820,4450 2820,4480 2840,4500 U1.3@2987.24,4500 ; 2924.8,2827.8 U17.6@3155,2827.8 3155,2935.51 3205,2985.51 U17.2@3205,3052.2 3205,3097 ; 3091.1,3559 U21.4@3143.35,3559 3203.68,3559 ; U20.11@3275.36,2516 3330,2516 3347,2533 ; 4073.83,3530.48 4092.92,3511.39 U13.5@4142.37,3511.39 4198.61,3511.39 4231,3479 ; U14.5@4141.38,2848.62 4141.38,2816.3 4158.68,2799 v1(4209,2799) ; C30.1@4290,2640 4290,2597 4321,2566 4352,2566 ; 4866.65,4465.35 U16.4@4866.65,4330.75 C29.2@5000,4330 5047,4330 ; U15.7@4916.34,3985 4850,3985 4827,3962 4827,3868 4858,3837 4965,3837 4978,3850 C28.2@5020,3850
  Top Layer w15: 2130,2500 2130,2544 2147,2561 v1@2692.91,2561.02
  Top Layer w20: R48.1@2130,2460 2130,2296 2186,2240 3560,2240 ; C32.1@3480,2296 3492,2308 3538,2308 3574,2308 3602,2280 ; L5.2@3560,2175.12 3560,2240 ; U18.1@3939,2489 4098.96,2490.04 4136,2453 v1(4136,2314.96) ; C35.2@3964.92,2284.9 3867.1,2284.9 3808,2344 3668,2344 3650,2326 C31.1@3650,2280 3602,2280 ; 3560,2240 3600,2280 3602,2280
  Bottom Layer w10: v1(2689.96,2562.01) 2689.96,2672.24 2677.17,2685.04 v1(2677.17,3654.53) 2797.24,3774.61 v1(2797.24,3985.24) ; v1(3880.91,3067.91) 3880.91,3221.46 3920.45,3261 v1(4126,3261) 4220,3261 4275,3316 v1(4310,3316) ; 4176.09,3067.91 4193,3051
  Bottom Layer w15: BT1.2@2980,3285.56 2980,3194 3250,2924 3250,2457 3271,2436 3271,2435 3421.1,2284.9 C35.2@3964.92,2284.9 ; v1(3880.91,3067.91) 4176.09,3067.91 ; 4193,3051 4209,3035 4209,2990 v1@4209,2805
  Bottom Layer w20: v1(4209,2799) 4315,2799
  other v1: 4148,2098 4379,2098 3834,2112 4272,2314.96 4512,2357.28 4636,3424 4832,3490 4205,3712 3084.65,3738.19 3744.09,3753.94 2544,4059 3410.43,4095.47 3194.83,4396.6 3756.87,4406.52 3631,5768
GND_PWR: C39.2 D4.1 J2.3 U3.8 | length 5415.9
  Top Layer w15: v1(2020.67,3307.09) 2438.98,3306.1 2452.28,3291.81 ; U3.8@2452.28,3233.7 2452.28,3291.81 ; C39.2@2580,3281.57 2502.87,3281.57 2492.64,3291.81 2452.28,3291.81
  Bottom Layer w20: v1(2020.67,3307.09) 2020.67,4310.67 2023.61,4313.61 2024.61,4313.61 2209.75,4498.75 2226.75,4515.75 v1(2289.37,4515.75) 2470.47,4515.75 2496.06,4541.34 2496,4796 J2.3@2566.93,4866.14 2564.86,4866.14 2496,4935 2496,5126 2532,5162 2629,5162 2738,5053 2738,4400 2571,4233 v1(2480,4233)
  Bottom Layer w30: v1(2020.67,3307.09) 2020.67,3270.67 2010,3260 2010,2180 2070,2120 D4.1@2140,2120
  other v1: 2011,3224 2504,3379 2493,3544 2480,3985
GPIO_D1: JP2.3 R14.2 U3.16 | length 1920.7
  Top Layer w10: U3.16@2099.41,3447.2 U3.16@2102.28,3444.33
  Top Layer w12: U3.16@2102.28,3444.33 2078.31,3444.33 2051,3471.64 2051,3473.61 2051,3558 2051,3559 2051,4106 2145,4200 R14.2@2190,4200 2190,4249.43 2194.35,4253.78 2247.57,4307 2486,4307 2519.61,4340.61 2620.14,4340.61 2693.9,4414.37 2693.9,4657.48 2719.8,4683.39 JP2.3@2860.16,4683.39
GPIO_D5: JP3.3 R18.2 U3.11 | length 2387.2
  Top Layer w12: R18.2@2190,3760 2154,3760 2144,3750 2144,3610.92 2163,3591.92 2185,3570 2291.34,3569.88 2352.28,3508.94 U3.11@2352.28,3444.33 2352.28,3372.95 v1(2332.68,3353.35)
  Bottom Layer w10: 2424.21,4032.68 2424.21,4033.21
  Bottom Layer w12: v1(2332.68,3353.35) 2376,3396.67 2376,3985 2380.37,3989.37 2380.91,3989.37 2424.21,4032.68 ; 2424.21,4033.21 2769,4378 2769,4852 2800.39,4883.39 JP3.3@2860.16,4883.39
GPIO_D6: JP4.3 R19.2 U3.10 | length 2104.1
  Top Layer w10: v1(2402.28,3353.62) v1@2402.56,3349.41
  Top Layer w12: R19.2@2190,3660 2190,3622 2200,3612 2211.61,3600.39 2317.91,3600.39 2402.28,3516.02 U3.10@2402.28,3444.33 v1(2402.28,3353.62)
  Bottom Layer w12: v1(2402.28,3353.62) 2402.28,3976.28 2794,4368 2794,4758 2819.39,4783.39 JP4.3@2860.16,4783.39
GPIO_I1: U2.97 U4.8 | length 488.5
  Top Layer w10: U4.8@2607.76,4244.61 2655.98,4244.61 2668.31,4232.28 2668.31,4178.15 2737.91,4108.54 U2.97@3008.23,4108.54
GPIO_I2: U2.98 U4.6 | length 426
  Top Layer w10: U4.6@2607.76,4144.61 2657.56,4144.61 2719.21,4082.95 U2.98@3008.23,4082.95
GPIO_I3: U2.99 U5.8 | length 427.8
  Top Layer w10: U5.8@2607.76,4024.61 2607.76,4045.75 2621.06,4059.06 2690.94,4059.06 2722.44,4059.06 2724.13,4057.36 U2.99@3008.23,4057.36
GPIO_I4: U2.100 U5.6 | length 480.8
  Top Layer w10: U5.6@2607.76,3924.61 2648.03,3924.61 2663.39,3939.96 2739.17,3939.96 2752.95,3953.74 2752.95,4015.04 2769.68,4031.77 2824.53,4031.77 U2.100@3008.23,4031.77
GPIO_I5: U2.103 U6.8 | length 462.8
  Top Layer w10: U6.8@2607.76,3804.61 2659.92,3804.61 2717.99,3804.61 2866.42,3953.03 2868.39,3955 U2.103@3008.23,3955
GPIO_I6: U2.104 U6.6 | length 494
  Top Layer w10: U6.6@2607.76,3704.61 2654.41,3704.61 2844.49,3894.68 2880.2,3930.39 U2.104@3008.23,3929.41
GPIO_O1: U2.105 U7.2 | length 1804.1
  Top Layer w10: U7.2@2113.7,2829.29 2113.7,2890.28 2192.91,2969.49 2684.06,2969.49 2689.96,2975.39 2719.49,3004.92 2719.49,3736.22 2888.07,3904.8 U2.105@3008.23,3903.82
GPIO_O2: U2.106 U7.4 | length 1687.1
  Top Layer w10: U7.4@2213.7,2829.29 2213.7,2883.98 2278.54,2948.82 2695.87,2948.82 2702.76,2955.71 2740.16,2993.11 2740.16,3720.47 2897.91,3878.23 U2.106@3008.23,3878.23
GPIO_O3: U2.107 U8.2 | length 1556.8
  Top Layer w10: U8.2@2333.7,2829.29 2333.7,2887.83 2374.02,2928.15 2707.68,2928.15 2713.58,2934.06 2713.58,2935.04 2762.8,2984.25 2762.8,3706.69 2909.45,3853.35 U2.107@3008.23,3852.64
GPIO_O4: U2.108 U8.4 | length 1440.3
  Top Layer w10: U8.4@2433.7,2829.29 2433.7,2885.47 2453.74,2905.51 2715.55,2905.51 2725.39,2915.35 2769.68,2959.65 2784.45,2974.41 2784.45,3690.94 2920.28,3826.77 U2.108@3008.23,3827.05
GPIO_O5: U2.109 U9.2 | length 1299.3
  Top Layer w10: U9.2@2553.7,2829.29 2553.7,2875.55 2562.01,2883.86 2724.41,2883.86 2735.24,2894.68 2789.37,2948.82 2805.12,2964.57 2805.12,3673.23 2933.07,3801.18 U2.109@3008.23,3801.46
GPIO_O6: U2.110 U9.4 | length 1156.4
  Top Layer w10: U9.4@2653.7,2829.29 2701.34,2829.29 ; 2702.32,2829.29 2809.06,2937.01 2810.04,2937.01 2825.79,2952.76 2825.79,3653.54 2946.85,3774.61 3006.97,3774.61 U2.110@3008.23,3775.87
GPIO_T1: J1.2 JP2.2 | length 1175.2
  Top Layer w10: 2816,4834 2889,4834 2911,4812 2911,4744 2920.75,4734.25 2921.26,4734.25 2925.2,4730.31 2960.16,4695.35 JP2.2@2960.16,4683.39 ; 2929.13,5515.75 2930.12,5515.75
  Top Layer w12: 2816,4834 2795,4855 2795,5026 2825.79,5057.09 2891.73,5057.09 2957.68,5123.03 3000,5165.35 3000,5445.87 2930.12,5515.75 ; 2929.13,5515.75 J1.2@2929.13,5593.7
GPIO_T2: J1.3 R15.2 U3.14 U3.15 | length 3614.2
  Top Layer w12: R15.2@2190,4100 2144,4100 2075,4031 2075,3574.91 2120,3529.91 2152.28,3497.62 U3.15@2152.28,3444.33 U3.14@2202.28,3444.33 2202.28,3388.31 2192.91,3378.94 2082.68,3378.94 2029,3432.61 2029,3546 2029,4147 2037.4,4155.4 2037.4,4155.51 2059.06,4177.17 2211.89,4330 2470,4330 2508,4368 2607,4368 2664.37,4425.2 2664.37,4994.27 2850,5179 2849.41,5227.36 2929.13,5308.07 J1.3@2929.13,5396.85
GPIO_T3: J1.1 R16.2 U3.13 | length 4014.2
  Top Layer w12: R16.2@2190,3980 2149,3980 2098,3929 2098,3589.86 2130,3557.86 2171.13,3516.73 2237.2,3516.73 2252.28,3501.65 U3.13@2252.28,3444.33 2252.28,3370.39 2236.22,3354.33 2072.83,3354.33 2005.91,3421.26 2005.91,3536.42 2005.91,4162.32 2010.83,4167.24 2011.24,4167.24 2196,4352 2197,4352 2454,4352 2499,4396 2503,4400 2597,4400 2636.81,4439.81 2636.81,4439.96 2636.81,5014.02 2817,5195 2817,5240 2817,5242 2856,5281 2856,5640 2927.61,5711.61 2929.13,5711.61 J1.1@2929.13,5790.55
GPIO_T4: J1.4 R17.2 U3.12 | length 2695.9
  Top Layer w10: 2812,4732 2886,4732 2911,4707 2911,4644 2887,4620 ; J1.4@2920,5200 J1.4@2929.13,5200
  Top Layer w12: U3.12@2302.28,3444.33 2302.28,3505.79 2267.72,3540.35 2186.58,3540.35 2180.65,3540.35 2121,3600 2121,3600.94 2121,3852 2149,3880 R17.2@2190,3880 2226,3880 2240,3894 2239,4226 2239,4245 2276,4282 2498,4282 2529,4313 2636,4313 2728,4405 2728,4583 2765,4620 2773,4620 2887,4620 ; 2812,4732 2765,4779 2765,5045 J1.4@2920,5200
GPIO_T5: J3.1 JP3.2 | length 2196.1
  Top Layer w10: 2909,5031 2909,4936 JP3.2@2960.16,4883.39
  Top Layer w12: 2909,5031 3023.57,5145.61 3023.57,5470.41 3003.94,5490.05 3000,5493.98 3000,5804 3038.46,5842.46 3038.46,5842.52 4024.61,5842.52 4033.48,5842.52 4085.45,5790.55 J3.1@4160,5790.55
GPIO_T6: J3.2 JP4.2 | length 2327.5
  Top Layer w10: JP4.2@2960.16,4783.39 2960.16,4786.93 3006.89,4833.66 3006.89,5079.72
  Top Layer w12: 3006.89,5079.72 3047.24,5120.08 3047.24,5493.11 3030.51,5509.84 3030.51,5789.37 3037.4,5796.26 3058.07,5816.93 4013.78,5816.93 4160,5670.71 J3.2@4160,5593.7
GPIO_T7: J3.3 JP1.2 | length 2305.7
  Bottom Layer w12: JP1.2@2960.16,4983.39 2960.16,5071.38 3032.48,5143.7 3032.48,5492.13 3032.48,5746.48 3116,5830 4019,5830 4071,5778 4071,5485.85 J3.3@4160,5396.85
GREEN_LED: D5.2 U2.81 | length 1237.4
  Top Layer w10: D5.2@3144.33,5687.52 3144.33,5687.33 3144.33,5642.67 3171,5616 3171,5406 3188.98,5388.02 3188.98,4593.5 3152.91,4557.44 3152.91,4550.55 U2.81@3152.91,4483.54
IIC_0: R29.1 U2.111 U17.3 U21.6 | length 1476.7
  Top Layer w10: 2853,3266 2853,3494 2868,3509 ; 2853,3278 2853,3219 2881,3191 2945,3191 2958,3178 2958,3172 2958,3064 2958,2917 2958,2895 2973,2880 R29.1@3010,2880 ; U21.6@2936.65,3509 2868,3509 ; U2.111@3008.23,3750.28 2954.02,3750.28 2923.23,3719.49 2852.36,3648.62 2852.36,3524.64 2868,3509
  Top Layer w12: R29.1@3010,2880 3044,2880 3049,2880 3060,2891 3060,2976 3078,2994 3142,2994 3155,3007 U17.3@3155,3052.2